# EAGLE board light_bulb_schematics (EAGLE 9.2.1)
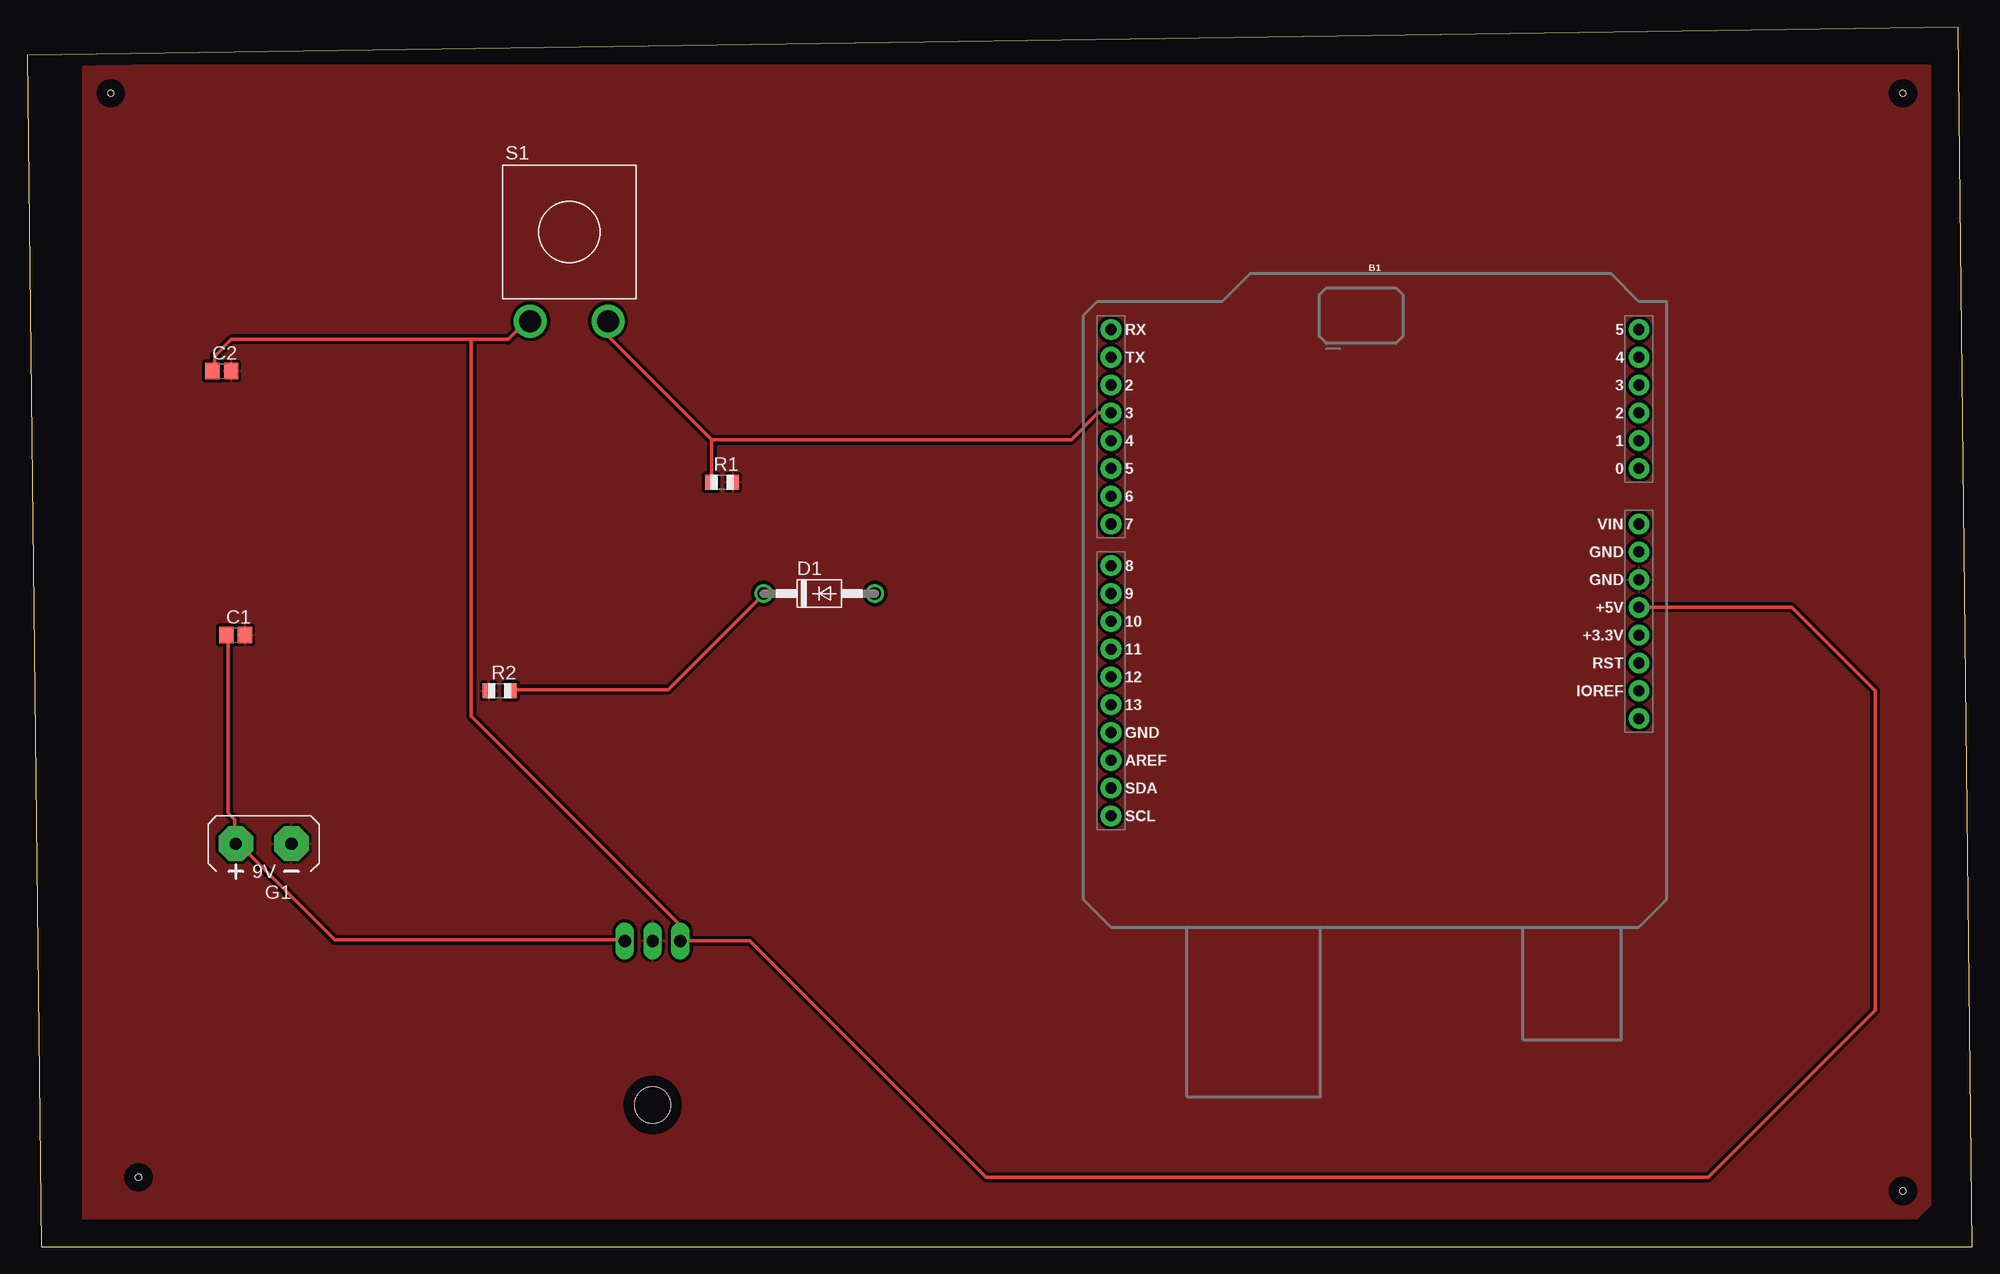
[diagram p0: board, top side]
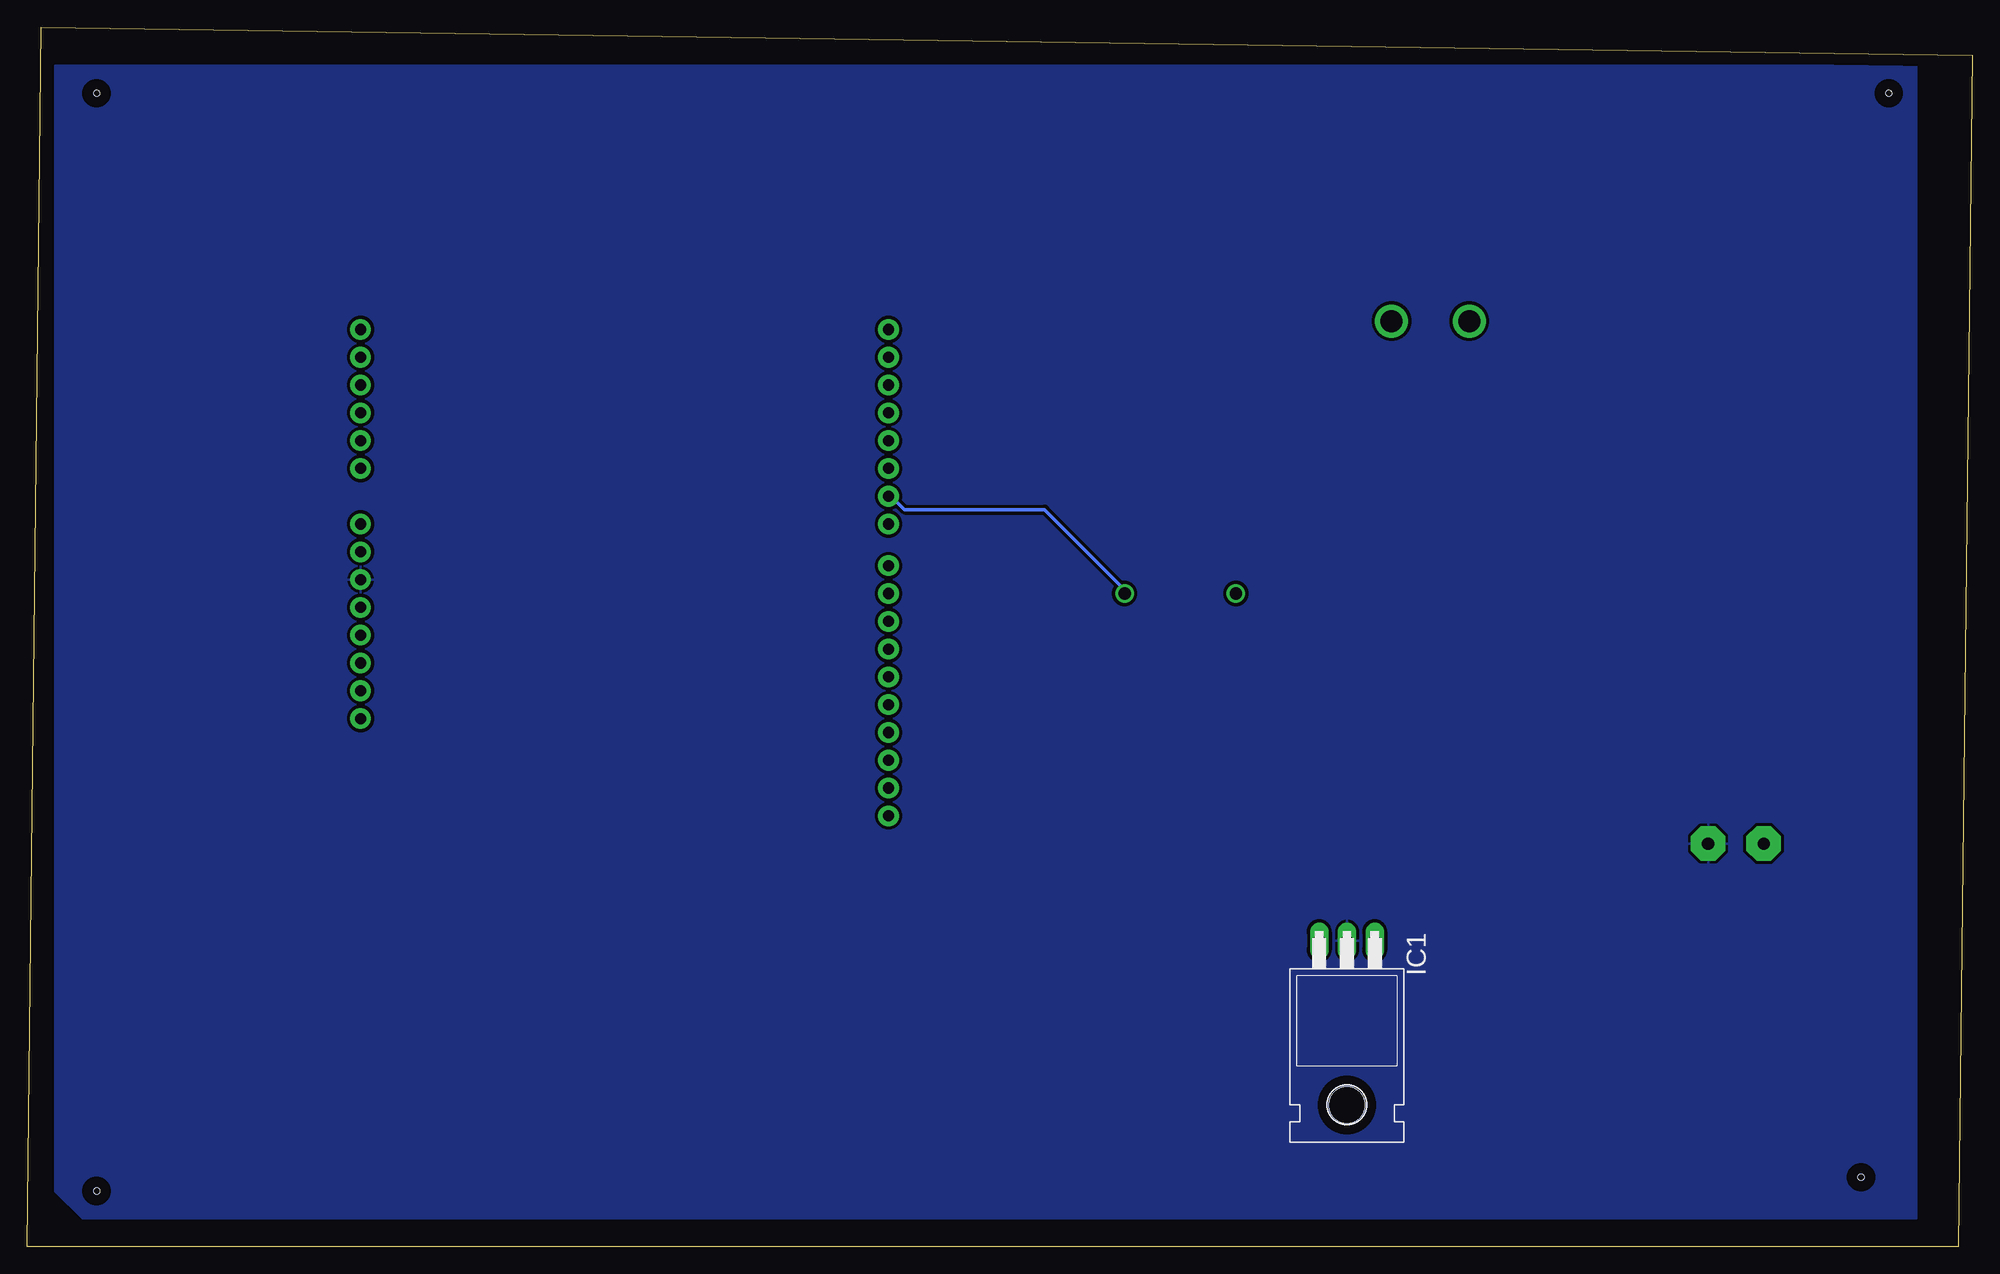
[diagram p1: board, bottom side, seen from below]

Size 177.78 x 111.43 mm. Coordinates in mm from the lower left corner, seen from the top.
Outline: 1.27,0 177.78,0 176.51,111.43 0,108.89 1.27,0
Copper layers (1*16): Top 0.035mm / dielectric 1.5mm / Bottom 0.035mm
Design rules "default": minimum track width 6mil, minimum drill 0.35mm, track to track 6mil, track to pad 6mil, pad to pad 6mil, via to via 6mil, smd to smd 6mil, copper to edge 40mil, drill to drill 6mil, minimum pad ring 10mil, minimum via ring 8mil, stop-mask expansion 4mil, vias tented up to drill 0mil, thermal gap 10mil
Net classes: 0 default: width 0.305 mm, drill 0.508 mm, clearance 0.305 mm
Holes 0.55 mm at 10.16,6.35 7.62,105.41 171.45,105.41 171.45,5.08

## Footprints (pad centres in the part's own frame; a part is rotated, then mirrored left to right if it is on the bottom)
UNO_R3_SHIELD = drill 1.016 pad 1.88: 3.3V 24.13,-2.54; 5V 24.13,0; A0 24.13,12.7; A1 24.13,15.24; A2 24.13,17.78; A3 24.13,20.32; A4 24.13,22.86; A5 24.13,25.4; AREF -24.13,-13.97; D2 -24.13,20.32; D3 -24.13,17.78; D4 -24.13,15.24; D5 -24.13,12.7; D6 -24.13,10.16; D7 -24.13,7.62; D8 -24.13,3.81; D9 -24.13,1.27; D10 -24.13,-1.27; D11 -24.13,-3.81; D12 -24.13,-6.35; D13 -24.13,-8.89; GND@0 24.13,2.54; GND@1 24.13,5.08; GND@2 -24.13,-11.43; IOREF 24.13,-7.62; NC 24.13,-10.16; RES 24.13,-5.08; RX -24.13,25.4; SCL -24.13,-19.05; SDA -24.13,-16.51; TX -24.13,22.86; VIN 24.13,7.62
C0805 = smd 1.3 x 1.5: 1 -0.85,0; 2 0.85,0
DO41-10 = drill 1.118: A 5.08,0; C -5.08,0
AB9V = drill 1.118 pad 3.15 octagon: + 0,2.54; - 0,-2.54
TO220H = drill 1.118 long: 1 -2.54,-10.16; 2 0,-10.16; 3 2.54,-10.16 | hole 3.302: 0,4.826
R0805 = smd 1.1 x 1.4: 1 -1,0; 2 1,0
JUDCOSPST = drill 2: P 3.556,-8.128; T -3.556,-8.128

## Placement (x,y rotation side)
B1  ARDUINO_UNO_R3_SHIELDBASIC  [UNO_R3_SHIELD]  123.19,58.42 0 top
C1  0.1  [C0805]  19.05,55.88 0 top
C2  0.1  [C0805]  17.78,80.01 0 top
D1  1N4004  [DO41-10]  72.39,59.69 0 top
G1  AB9V  [AB9V]  21.59,36.83 90 top
IC1  7805T  [TO220H]  57.15,17.78 180 bottom
R1  100k  [R0805]  63.5,69.85 0 top
R2  100k  [R0805]  43.18,50.8 0 top
S1  SPST  [JUDCOSPST]  49.53,92.71 0 top

## Library data of the parts
B1 = SparkFun-Boards
C1 C2 IC1 R1 R2 S1 = adafruit
D1 = diode
G1 = battery

## Nets
+5V: B1.5V C2.1 IC1.3 S1.T
GND: B1.GND@0 C1.2 C2.2 G1.- IC1.2 R1.2 R2.1
N$1: C1.1 G1.+ IC1.1
N$2: D1.C R2.2
N$4: B1.D3 R1.1 S1.P
N$6: B1.D6 D1.A

## Tracks (layer width: path | path; a pad name or v marks a point on that pad's centre or on a via)
+5V
  Top 0.305: 40.59,82.91 43.94,82.91 45.77,84.73 S1.T | 40.59,82.91 18.64,82.91 17.12,81.38 17.12,80.16 C2.1 | 59.49,28.35 59.49,29.57 40.59,48.46 40.59,82.91 | 59.49,28.35 59.49,28.04 IC1.3 | 146.66,58.22 147.27,58.22 | 147.27,58.22 B1.5V | 59.49,28.35 IC1.3 | IC1.3 66.04,27.94 87.63,6.35 153.67,6.35 168.91,21.59 168.91,50.8 161.29,58.42 147.47,58.42 147.27,58.22
GND
  pour Top: 5.08,105.41 5.08,2.54 172.72,2.54 173.99,3.81 173.99,107.95 5.08,107.95
  pour Bottom: 5.08,107.95 5.08,2.54 172.72,2.54 175.26,5.08 175.26,107.95 6.35,107.95
N$1
  Top 0.305: C1.1 18.34,55.78 18.34,39.62 18.95,39.01 18.95,36.88 G1.+ 19.25,36.88 28.09,28.04 54.61,28.04 IC1.1
N$2
  Top 0.305: R2.2 44.25,50.9 58.57,50.9 66.8,59.13 66.8,59.44 67.11,59.74 D1.C
N$4
  Top 0.305: 62.54,73.76 62.54,70.1 R1.1 | 62.54,73.76 53.09,83.21 S1.P | B1.D3 97.89,76.2 95.45,73.76 62.54,73.76
N$6
  Bottom 0.305: D1.A 77.47,60.05 84.78,67.36 97.59,67.36 98.81,68.58 B1.D6